# EAGLE board supply_Dio Faziko Pratama(Line Follower) (EAGLE 9.6.2)
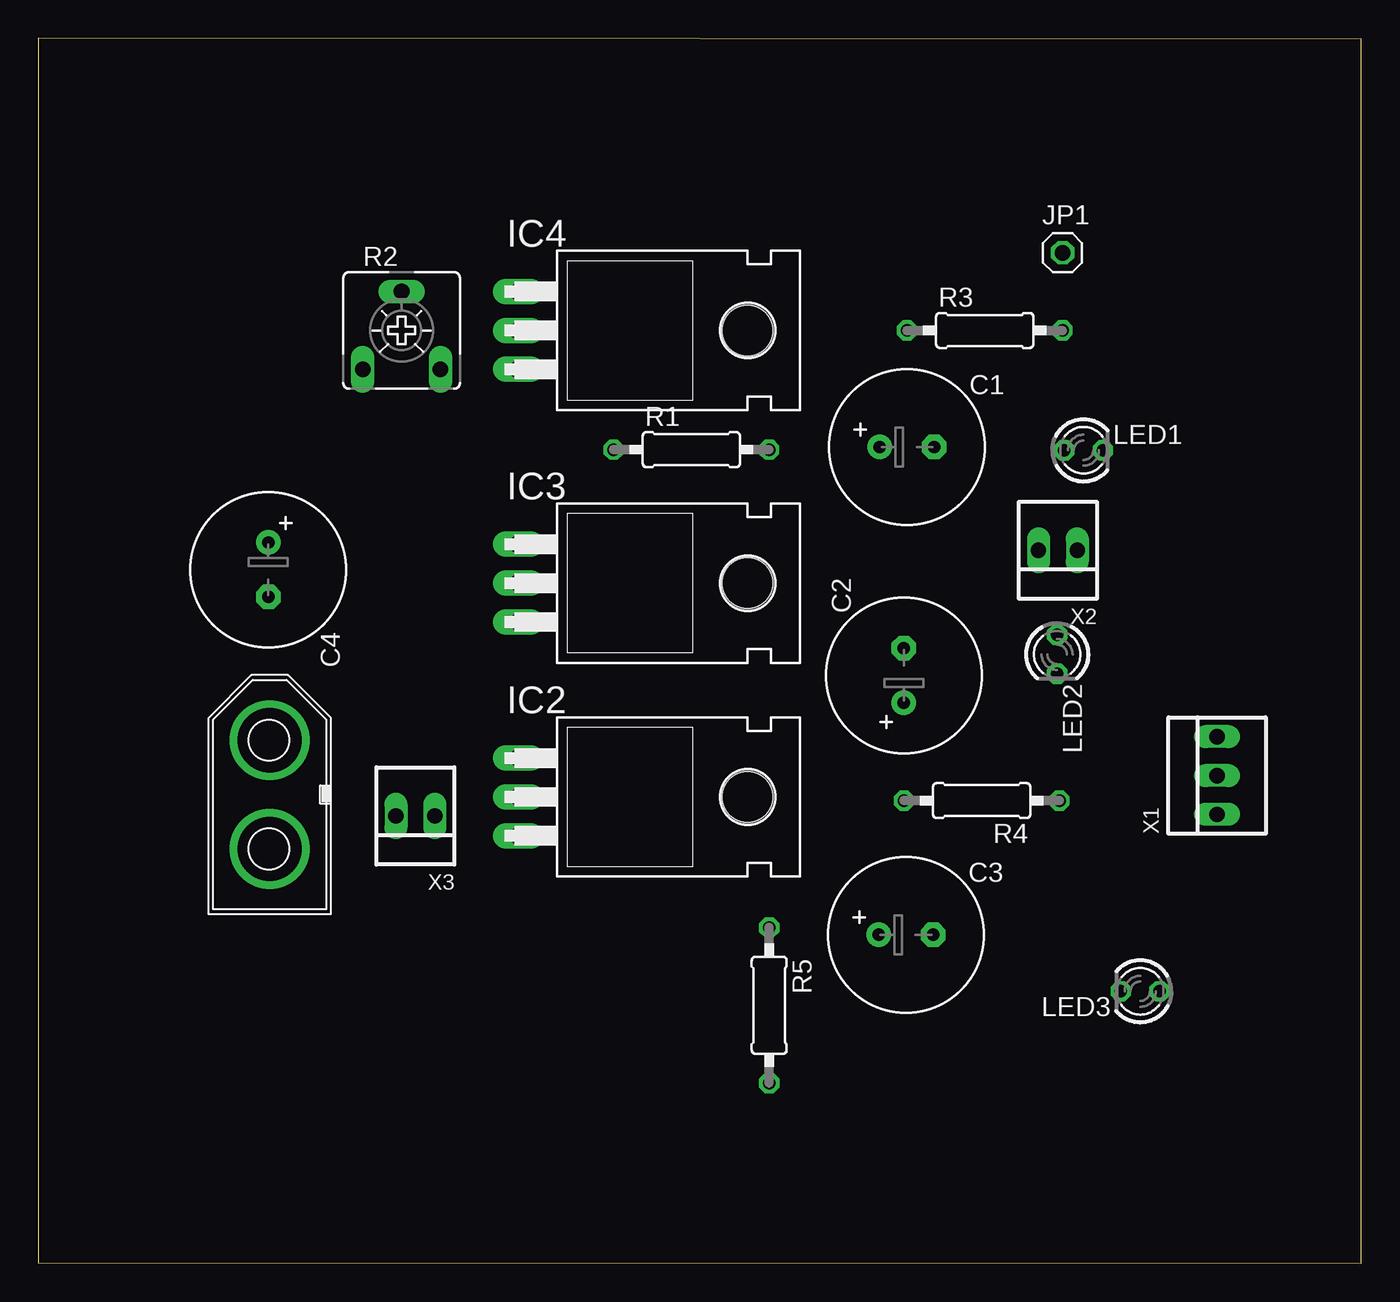
[diagram p0: board, top side]
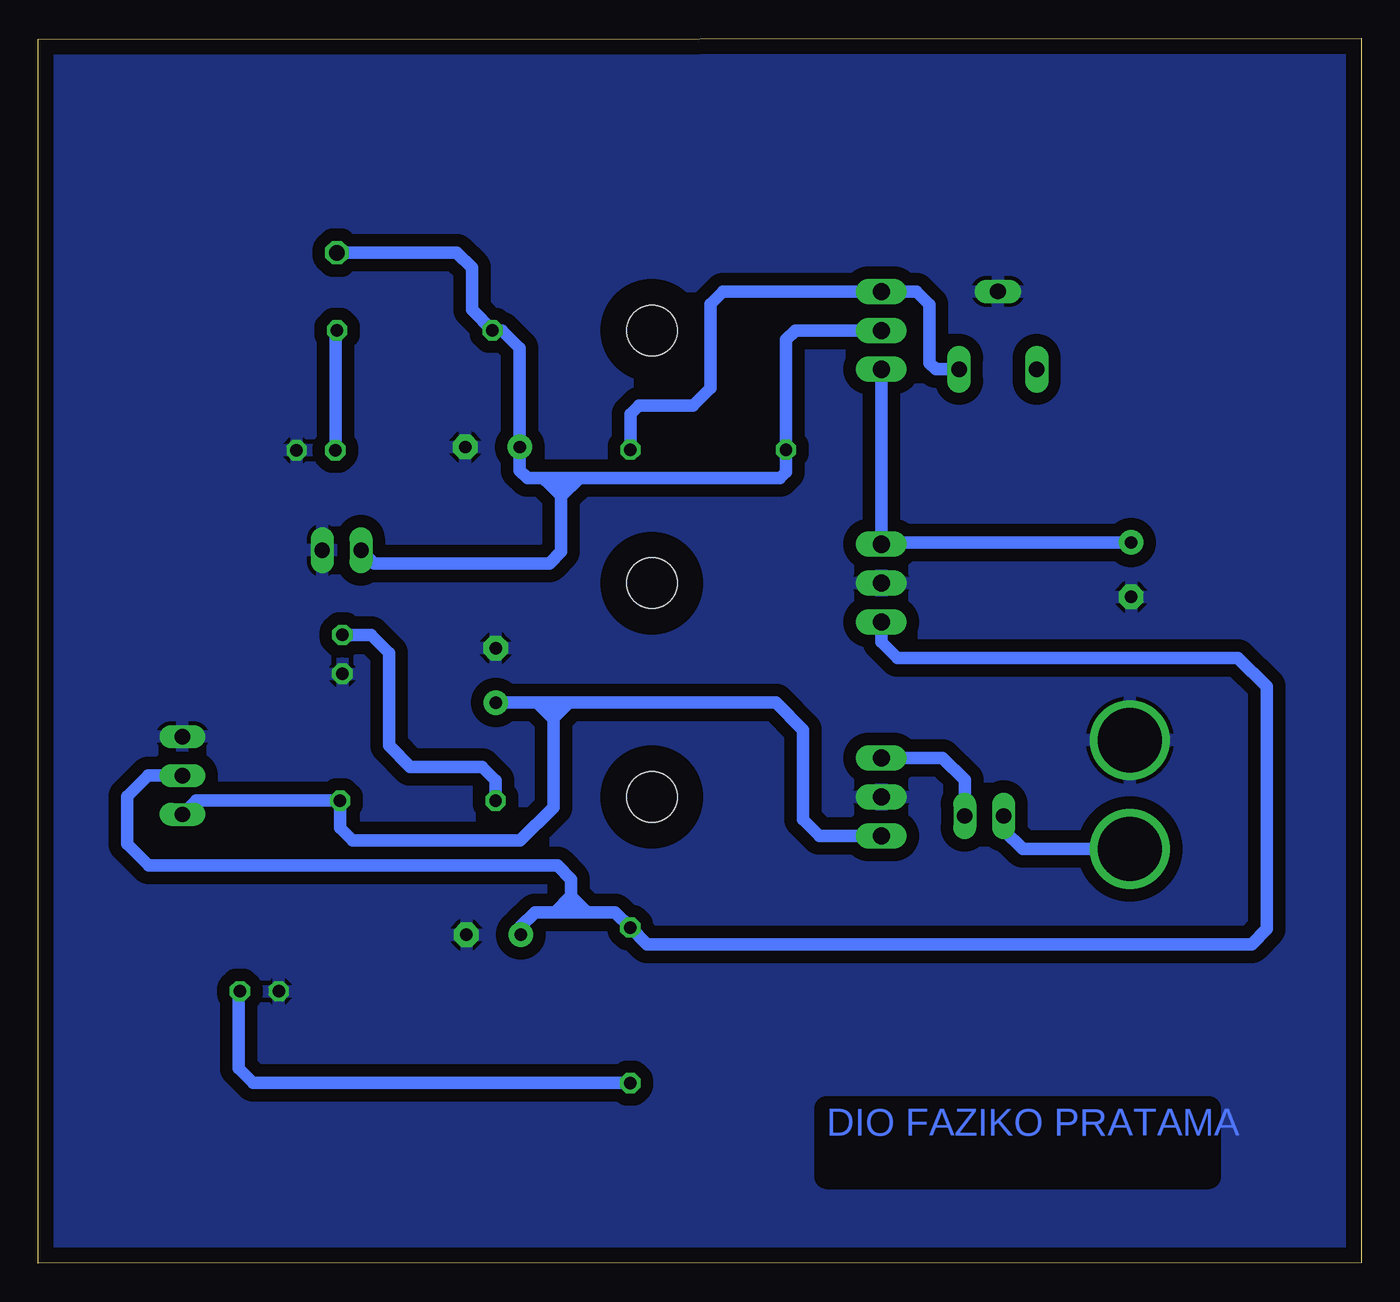
[diagram p1: board, bottom side, seen from below]

Size 86.44 x 80.05 mm. Coordinates in mm from the lower left corner, seen from the top.
Outline: 0,0.05 86.44,0 86.44,80 0,80.05 0,0.05
Copper layers (1*16): Top 0.035mm / dielectric 1.5mm / Bottom 0.035mm
Design rules "default": minimum track width 6mil, minimum drill 0.35mm, track to track 6mil, track to pad 6mil, pad to pad 6mil, via to via 6mil, smd to smd 6mil, copper to edge 40mil, drill to drill 6mil, minimum pad ring 10mil, minimum via ring 8mil, stop-mask expansion 4mil, vias tented up to drill 0mil, thermal gap 10mil

## Footprints (pad centres in the part's own frame; a part is rotated, then mirrored left to right if it is on the bottom)
E3,5-10 = drill 0.813 pad 1.6: + -1.778,0 | drill 0.813 pad 1.6 octagon: - 1.778,0
TO220H = drill 1.118 long: 1 -2.54,-10.16; 2 0,-10.16; 3 2.54,-10.16 | hole 3.302: 0,4.826
1X01 = drill 1.016 octagon: 1 0,0
LED3MM = drill 0.813 octagon: A -1.27,0; K 1.27,0
0207/10 = drill 0.813 octagon: 1 -5.08,0; 2 5.08,0
CA6V = drill 1.016 long: A -2.54,-2.54; E 2.54,-2.54; S 0,2.54
CON-XT60M = drill 4.2: V+ -3.55,0; V- 3.55,0
22-23-2031 = drill 1 long: 1 -2.54,0; 2 0,0; 3 2.54,0
22-23-2021 = drill 1 long: 1 -1.27,0; 2 1.27,0

## Placement (x,y rotation side)
C1  1000uF/16V  [E3,5-10]  56.76,53.34 0 top
C2  1000uF/16V  [E3,5-10]  56.55,38.43 90 top
C3  1000uF/16V  [E3,5-10]  56.69,21.48 0 top
C4  1000uF/16V  [E3,5-10]  15.03,45.32 270 top
IC2  7805T  [TO220H]  41.52,30.48 270 top
IC3  7805T  [TO220H]  41.52,44.45 270 top
IC4  317T  [TO220H]  41.52,60.96 270 top
JP1  [1X01]  66.92,66.04 0 top
LED1  [LED3MM]  68.3,53.13 0 top
LED2  [LED3MM]  66.57,39.8 270 top
LED3  [LED3MM]  72,17.78 180 top
R1  1K2  [0207/10]  42.67,53.17 0 top
R2  20K  [CA6V]  23.74,60.96 0 top
R3  1K  [0207/10]  61.84,60.96 0 top
R4  1K  [0207/10]  61.64,30.24 180 top
R5  1K  [0207/10]  47.76,16.87 270 top
VIN  [CON-XT60M]  15.12,30.64 90 top
X1  VSYS  [22-23-2031]  77.02,31.88 90 top
X2  VMOT  [22-23-2021]  66.62,46.6 180 top
X3  switch  [22-23-2021]  24.64,29.24 180 top

## Library data of the parts
C1-C4 R1 R3-R5 = rcl
IC2-IC4 = linear
JP1 = pinhead
LED1-LED3 = led
R2 = pot
VIN = con-XT60M
X1 = con-molex; MF: MOLEX; MPN: 22-23-2031; OC_FARNELL: 1462950; OC_NEWARK: 30C0862
X2 X3 = con-molex; MF: MOLEX; MPN: 22-23-2021; OC_FARNELL: 1462926; OC_NEWARK: 25C3832

## Nets
+12V: C3.+ IC3.3 R5.1 X1.2
GND: C1.- C2.- C3.- C4.- IC2.2 IC3.2 LED1.K LED2.K LED3.K R2.S VIN.V- X1.3 X2.1
N$1: IC4.1 R1.2 R2.E
N$2: LED1.A R3.2
N$3: LED3.A R5.2
N$4: VIN.V+ X3.2
N$5: LED2.A R4.2
S$1: IC2.1 X3.1
VCC: C2.+ IC2.3 R4.1 X1.1
VDD: C1.+ IC4.2 JP1.1 R1.1 R3.1 X2.2
VPP: C4.+ IC3.1 IC4.3

## Tracks (layer width: path | path; a pad name or v marks a point on that pad's centre or on a via)
+12V
  Bottom 0.813: IC3.3 31.36,40.62 30.31,39.56 8.05,39.56 6.18,37.69 6.18,21.84 7.16,20.86 46.67,20.86 R5.1 48.75,22.94 50.65,22.94 | 50.65,22.94 51.62,22.94 | 51.62,22.94 52.68,22.94 | 52.68,22.94 54,22.94 54.92,22.02 C3.+ | X1.2 79.25,31.88 80.62,30.5 80.62,27.41 79.21,25.99 52.51,25.99 51.62,25.1 51.62,24 | 51.62,22.94 51.62,24 | 51.62,24 52.68,22.94 | 51.62,24 50.65,23.04 50.65,22.94
GND
  pour Bottom (isolate 0.813): 0.02,79.68 0.02,0.35 86.24,0.35 86.24,79.7 0.05,79.7
N$1
  Bottom 0.813: R2.E 27.79,58.42 28.21,58.84 28.21,62.64 29.07,63.5 IC4.1 41.71,63.5 42.53,62.68 42.53,57.18 43.66,56.05 47.2,56.05 47.75,55.5 R1.2
N$2
  Bottom 0.813: LED1.A 67.03,60.85 R3.2
N$3
  Bottom 0.813: R5.2 72.41,11.79 73.36,12.74 73.36,17.69 LED3.A
N$4
  Bottom 0.813: X3.2 23.37,28.34 22.12,27.09 VIN.V+
N$5
  Bottom 0.813: R4.2 56.56,31.56 57.44,32.44 62.14,32.44 63.53,33.84 63.53,39.89 64.7,41.07 LED2.A
S$1
  Bottom 0.813: X3.1 25.91,31.58 27.35,33.02 IC2.1
VCC
  Bottom 0.813: IC2.3 35.41,27.94 36.46,28.99 36.46,34.87 38.24,36.65 51.74,36.65 | 51.74,36.65 52.78,36.65 | 52.78,36.65 53.88,36.65 | 53.88,36.65 C2.+ | 52.78,35.61 52.78,29.8 54.95,27.64 65.92,27.64 66.72,28.44 R4.1 76.12,30.24 X1.1 | 52.78,36.65 52.78,35.61 | 52.78,35.61 51.74,36.65 | 52.78,35.61 52.84,35.61 53.88,36.65
VDD
  Bottom 0.813: IC4.2 36.97,60.96 37.59,60.34 R1.1 37.59,51.69 37.97,51.31 51.09,51.31 | 51.09,51.31 52.27,51.31 | 52.27,51.31 53.31,51.31 | 53.31,51.31 54.48,51.31 54.98,51.82 C1.+ 54.98,59.8 56.15,60.96 R3.1 58.11,62.31 58.11,65.06 59.09,66.04 JP1.1 | X2.2 64.48,45.73 53.04,45.73 52.27,46.5 52.27,50.12 | 52.27,50.12 52.27,51.31 | 51.09,51.31 52.27,50.12 | 52.27,50.12 53.31,51.16 53.31,51.31
VPP
  Bottom 0.813: C4.+ 31.25,47.1 | 31.25,47.1 IC3.1 | IC4.3 31.36,47.22 31.25,47.1

## Text on the board
Bottom: DIO FAZIKO PRATAMA